# Altium PCB OutDoor-V3.PcbDoc
Units mm, origin at the board's own origin, x right, y up, seen from the top; angles counter-clockwise.
Board outline 20.89 x 21.75 mm, 2 copper layers (Top Layer, Bottom Layer), stack 1 mm thick; 12 components, 17 nets, 55 pads, 5 vias.
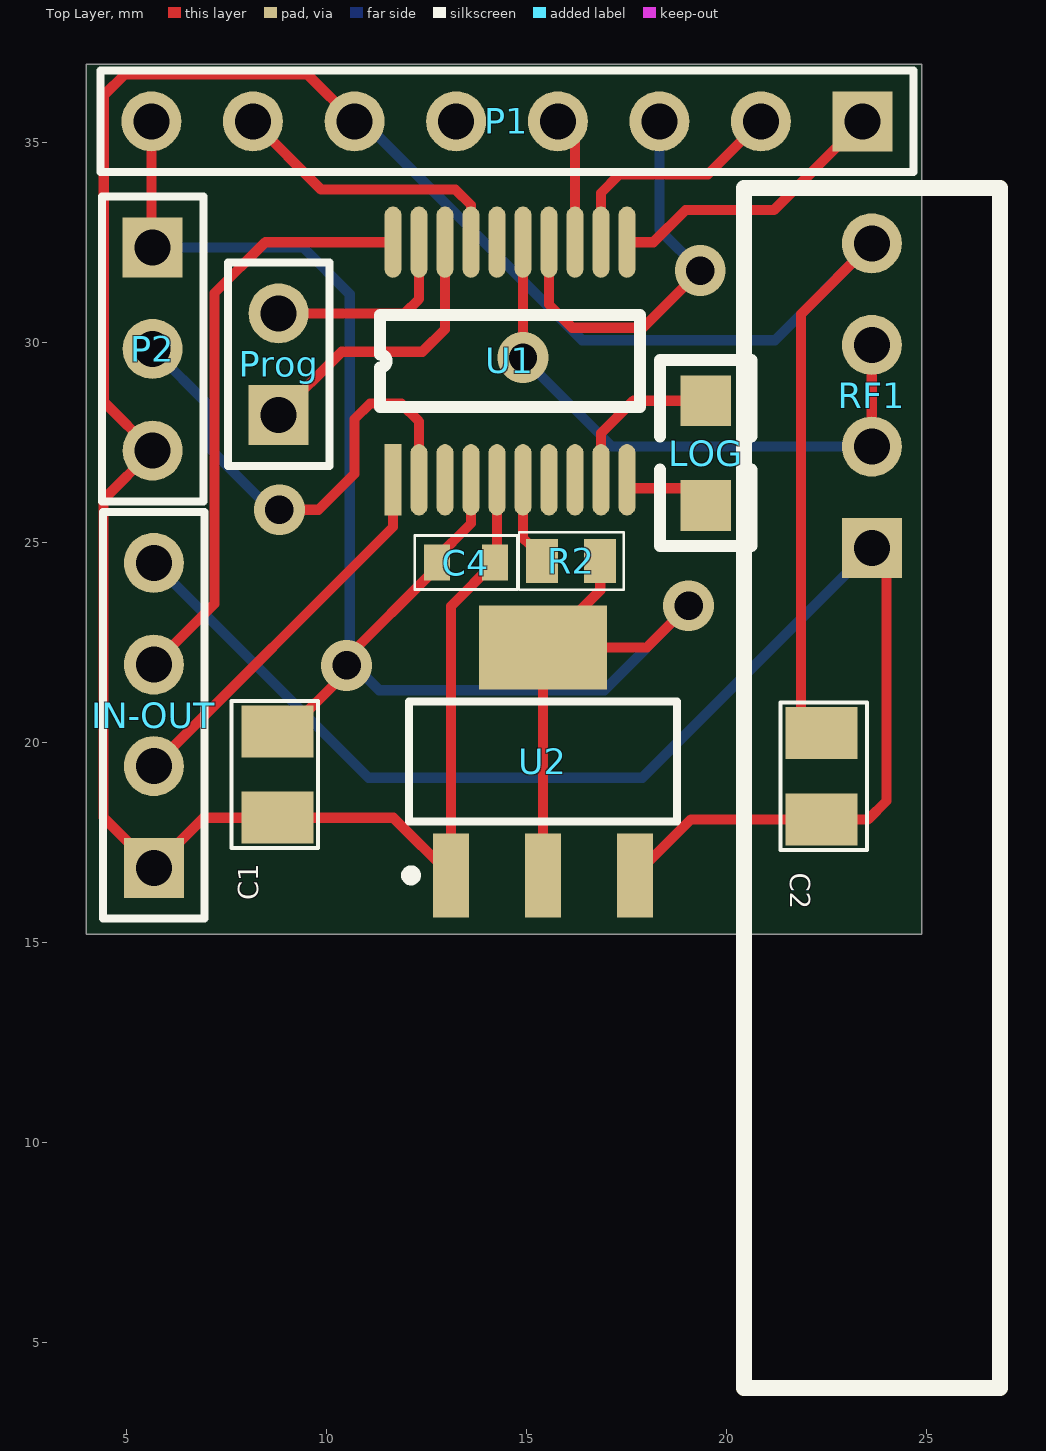
[diagram p0: Top Layer view]
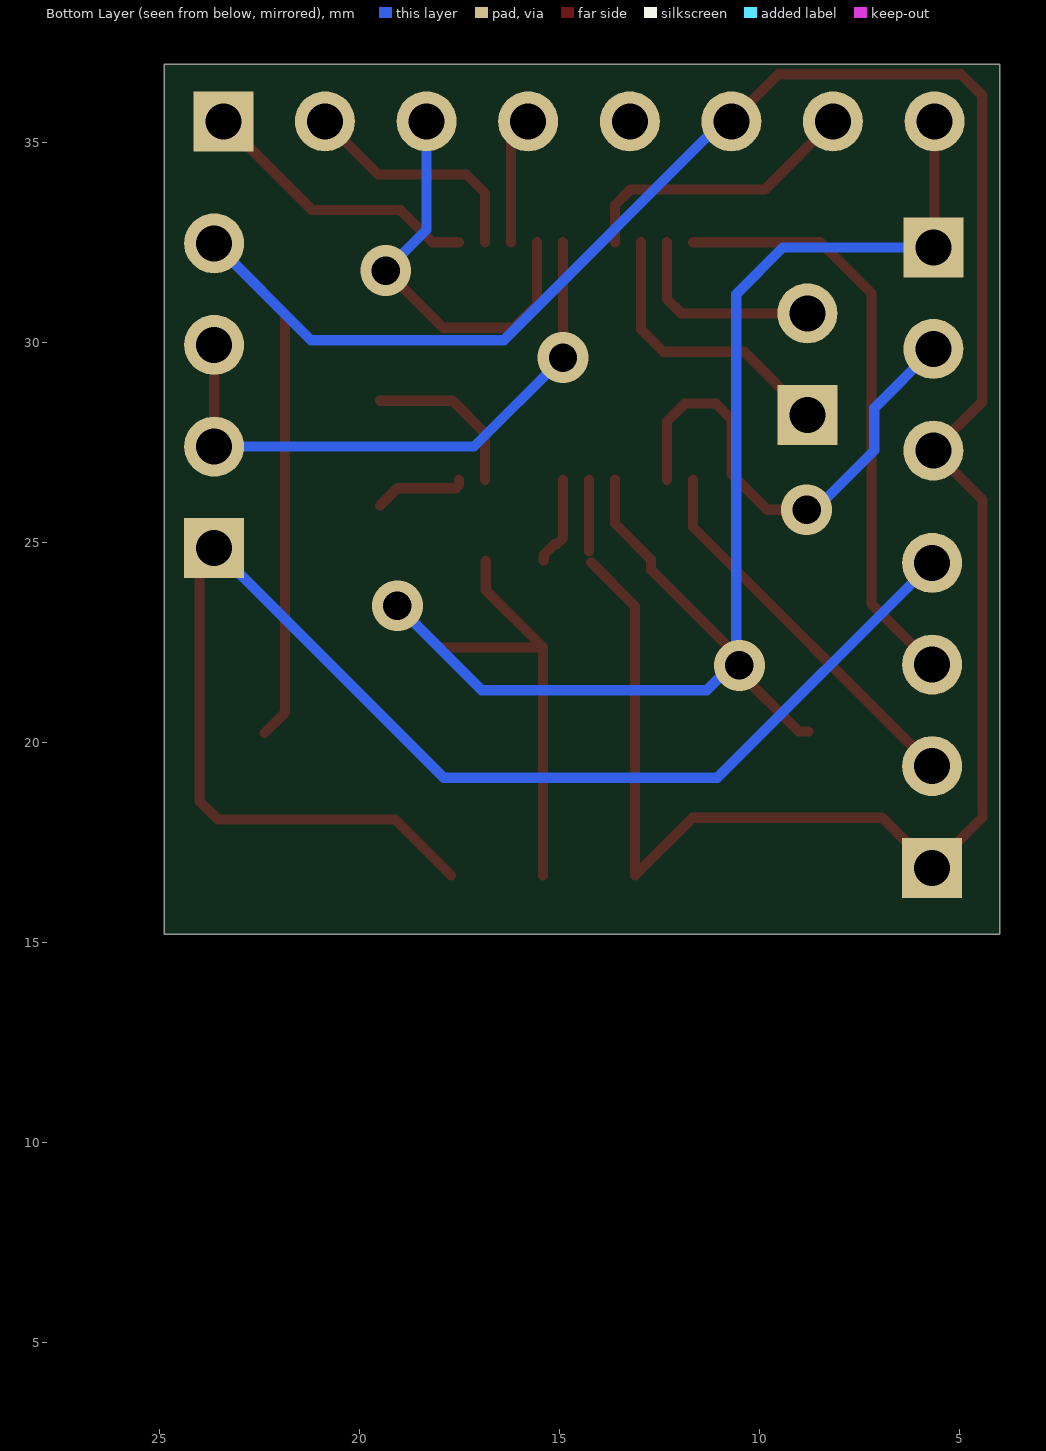
[diagram p1: Bottom Layer view, seen from below]

## Layer stack, top to bottom
Top Solder: solder mask 0.0102, Solder Resist, Dk 3.5
Top Layer: signal copper 0.0356
Dielectric 1: dielectric 0.929, FR-4, Dk 4.8
Bottom Layer: signal copper 0.0356
Bottom Solder: solder mask 0.0102, Solder Resist, Dk 3.5

## Board outline
3.99,15.22 24.88,15.22 24.88,36.97 3.99,36.97

## Design rules (kind name [scope] priority, off if disabled: settings)
Clearance [All] p1: gap=0.2 ignorepadtopadclearanceinfootprint=FALSE except(0: Arc-Hole Track-Hole SMDPad-Hole THPad-Hole Via-Hole Fill-Hole Poly-Hole Region-Hole Text-Hole; 0.4: Arc-Poly Track-Poly SMDPad-Poly THPad-Poly Via-Poly Fill-Poly Poly-Poly Poly-Region Poly-Text)
ComponentClearance [All] p1: gap=0 collisioncheckmode=3 verticalgap=0 showdistances=FALSE
DiffPairsRouting [All] p1: maxlimit=0.3 minlimit=0.1 mostfreqgap=0.2 toplayer_minwidth=0.1 toplayer_maxwidth=0.3 toplayer_prefwidth=0.2 bottomlayer_minwidth=0.1 bottomlayer_maxwidth=0.3 bottomlayer_prefwidth=0.2 maxuncoupledlength=12.7
MinimumSolderMaskSliver [All] p1: minsoldermaskwidth=0.004
PlaneConnect [All] p1: planeconnectstyle=Relief reliefexpansion=0.508 reliefentries=2 reliefconductorwidth=0.254 reliefairgap=0.254
PolygonConnect [All] p1: connectstyle=Relief reliefconductorwidth=0.254 reliefentries=4 polygonreliefangle="90 Angle" airgapwidth=0.254
PolygonConnect PolygonConnect_1 [InViaShielding vs InViaShielding] p2: connectstyle=Direct reliefconductorwidth=0.254 reliefentries=4 polygonreliefangle="90 Angle" airgapwidth=0.254
RoutingVias [All] p1: holewidth=0.711 width=1.27 viastyle="Through Hole" minholewidth=0.6 minwidth=1 maxholewidth=0.8 maxwidth=1.4
SilkToSolderMaskClearance [IsPad] p1: minsilkscreentomaskgap=0.025 clearancetoexposedcopper=TRUE
SolderMaskExpansion [All] p1: expansion=0.102 istentingtop=FALSE
Width [All] p1: maxlimit=1 minlimit=0.2 preferedwidth=0.254
25 further rules are at their usual default settings.

## Components (designator, comment, footprint, x,y, rotation, side; value= is the part's Value field where it differs from the comment)
C1 "10UF" CAP805 8.77,20.29 r270 top
C2 "10UF" CAP805 22.37,18.09 r90 top
C4 "CAP100NF25V0603" CAP603 12.76,24.51 r90 top value=100nF
IN-OUT "Header 4" HDR1X4 5.68,16.88 r90 top
LOG "Header 2" 0805 19.48,25.94 r90 top
P1 "RC522" HDR1X8 23.4,35.54 r180 top
P2 "TouchBoard" HDR1X3 5.65,32.39 r270 top
Prog "Header 2" HDR1X2 8.8,28.2 r90 top
R2 "10K" R0603 16.84,24.55 r180 top
RF1 "Header 4" RXB22 23.63,24.87 r0 top
U1 "STM32G030F6P6" SSOP20 11.66,26.58 r90 top
U2 "AMS1117" SOT-223 13.11,16.69 r0 top

## Footprints (in the part's own frame and the unit in brackets; to place one, negate y for a bottom-side part, rotate by r counter-clockwise, add the part's x,y. Pads: shape width x height; smd on the part's side, far side on the other; paste and mask are expansions set on the pad)
0805 [mil]
  rect 50x50 smd: 1(0,0) 2(103,0)
  silkscreen extent -40,-45 143,45
CAP603 [mm]
  rect 0.9x0.65 smd: 1(0,0) 2(0,-1.45)
  silkscreen extent -0.67,-2.01 0.68,0.55, body extent -0.43,-1.55 0.43,0.1, height 0.4
CAP805 [mm]
  rect 1.3x1.8 smd: 1(0,0) 2(2.159,0)
  silkscreen extent -0.76,-1.14 2.92,1.02, body extent -0.04,-0.66 2.01,0.64, height 0.5
HDR1X2 [mm] "Connector; Header; 2 Position"
  rect 1.5x1.5 hole 0.9: 1(0,0)
  round 1.5 hole 0.9: 2(2.54,0)
  silkscreen extent -1.27,-1.27 3.81,1.27
HDR1X3 [mm] "Connector; Header; 3 Position"
  rect 1.5x1.5 hole 0.9: 1(0,0)
  round 1.5 hole 0.9: 2(2.54,0) 3(5.08,0)
  silkscreen extent -1.27,-1.27 6.35,1.27
HDR1X4 [mm] "Connector; Header; 4 Position"
  rect 1.5x1.5 hole 0.9: 1(0,0)
  round 1.5 hole 0.9: 2(2.54,0) 3(5.08,0) 4(7.62,0)
  silkscreen extent -1.27,-1.27 8.89,1.27
HDR1X8 [mm] "Connector; Header; 8 Position"
  rect 1.5x1.5 hole 0.9: 1(0,0)
  round 1.5 hole 0.9: 2(2.54,0) 3(5.08,0) 4(7.62,0) 5(10.16,0) 6(12.7,0) 7(15.24,0) 8(17.78,0)
  silkscreen extent -1.27,-1.27 19.05,1.27
R0603 [mm]
  rect 0.8x1.1 smd: 1(0,0) 2(1.45,0)
  silkscreen extent -0.59,-0.71 2.03,0.72, body extent -0.1,-0.43 1.55,0.43, height 0.4
RXB22 [mm]
  rect 1.5x1.5 hole 0.9: 1(0,0)
  round 1.5 hole 0.9: 2(0,2.54) 3(0,5.08) 4(0,7.62)
  silkscreen extent -3.2,-21 3.2,9
SOT-223 [mm]
  rect 0.9x2.1 smd: 1(0,0) 2(2.3,0) 3(4.6,0)
  rect 3.2x2.1 smd: 4(2.3,5.7)
  silkscreen extent -1.12,-0.12 5.65,4.35, body extent -0.94,-0.64 5.54,6.34, height 1.64
SSOP20 [mm]
  rect 1.78x0.42 smd: 1(0,0)
  oval 1.78x0.42 smd: 2(0,-0.65) 3(0,-1.3) 4(0,-1.95) 5(0,-2.6) 6(0,-3.25) 7(0,-3.9) 8(0,-4.55) 9(0,-5.2) 10(0,-5.85) 11(5.94,-5.85) 12(5.94,-5.2) 13(5.94,-4.55) 14(5.94,-3.9) 15(5.94,-3.25) 16(5.94,-2.6) 17(5.94,-1.95) 18(5.94,-1.3) 19(5.94,-0.65) 20(5.94,0)
  silkscreen extent 1.82,-6.18 4.12,0.33

## Part data
C1 C2: library part radial, "radial cap", VOLT=16
C4: "CAP CER 0.1UF 25V X5R 0603", Capacitance=100nF, Case Code (Imperial)=0603, Case Code (Metric)=1608, Dielectric=X5R, Manufacturer 1="Kyocera AVX", Manufacturer Part Number 1=06033D104KAT2A, Max Operating Temperature=85°C, Min Operating Temperature=-55°C, Package Quantity=1, Supplier Part Number 1=478-1244-1-ND, Tolerance=10%, Voltage=25V, Case/Package=0603, ComponentLink1Description=https://datasheet.ciiva.com/19475/1031061-19475906.pdf?src-supplier=Jameco, ComponentLink1URL=https://datasheet.ciiva.com/19475/1031061-19475906.pdf?src-supplier=Jameco, ComponentLink2Description=https://datasheet.ciiva.com/152/cx5r-152225.pdf?src-supplier=Digi-Key, ComponentLink2URL=https://datasheet.ciiva.com/152/cx5r-152225.pdf?src-supplier=Digi-Key, ComponentLink3Description=https://datasheet.ciiva.com/2987/cx5r-2987761.pdf?src-supplier=Avnet, ComponentLink3URL=https://datasheet.ciiva.com/2987/cx5r-2987761.pdf?src-supplier=Avnet, ComponentLink4Description=https://datasheet.ciiva.com/152/cx5r-152227.pdf?src-supplier=Digi-Key, ComponentLink4URL=https://datasheet.ciiva.com/152/cx5r-152227.pdf?src-supplier=Digi-Key, ComponentLink5Description=https://datasheet.ciiva.com/16397/cx5r-16397162.pdf?src-supplier=Future+Electronics, ComponentLink5URL=https://datasheet.ciiva.com/16397/cx5r-16397162.pdf?src-supplier=Future+Electronics, ComponentLink6Description=https://datasheet.ciiva.com/28613/759405-28613274.pdf?src-supplier=Element14, ComponentLink6URL=https://datasheet.ciiva.com/28613/759405-28613274.pdf?src-supplier=Element14, ComponentLink7Description=https://datasheet.ciiva.com/152/cx5r-152226.pdf?src-supplier=Digi-Key, ComponentLink7URL=https://datasheet.ciiva.com/152/cx5r-152226.pdf?src-supplier=Digi-Key, ComponentLink8Description=https://datasheet.ciiva.com/2987/cx5r-2987762.pdf?src-supplier=Avnet, ComponentLink8URL=https://datasheet.ciiva.com/2987/cx5r-2987762.pdf?src-supplier=Avnet, ComponentLink9Description=https://datasheet.ciiva.com/28613/1666675-28613275.pdf?src-supplier=Element14, ComponentLink9URL=https://datasheet.ciiva.com/28613/1666675-28613275.pdf?src-supplier=Element14, ComponentLink10Description=https://datasheet.ciiva.com/28613/1666675-28613037.pdf?src-supplier=Element14, ComponentLink10URL=https://datasheet.ciiva.com/28613/1666675-28613037.pdf?src-supplier=Element14, Contact Plating=Tin, Depth=0.81mm, Description 1="CAP CER 0.1UF 25V X5R 0603", Height=0.9mm, Lead Free="Lead Free", Length=1.6mm, Mount="Surface Mount", Number of Pins=2, Packaging="Tape and Reel", Pricing 1="1=0,35000, 10=0,24200, 100=0,14490, 500=0,10868, 1000=0,09177 (USD)", Radiation Hardening=No, REACH SVHC="No SVHC", RoHS=Yes, Stock 1=100206, Supplier 1=Digi-Key, Termination=SMD/SMT, Thickness=0.035inch, Voltage Rating=25V, Voltage Rating (DC)=25V, Width=0.032inch
IN-OUT RF1: "Header, 4-Pin", LatestRevisionDate=17-Jul-2002, LatestRevisionNote="Re-released for DXP Platform.", Publisher="Altium Limited"
LOG Prog: "Header, 2-Pin", LatestRevisionDate=17-Jul-2002, LatestRevisionNote="Re-released for DXP Platform.", Publisher="Altium Limited"
P1: library part "Header 8", "Header, 8-Pin", LatestRevisionDate=17-Jul-2002, LatestRevisionNote="Re-released for DXP Platform.", Publisher="Altium Limited"
P2: library part "Header 3", "Header, 3-Pin", LatestRevisionDate=17-Jul-2002, LatestRevisionNote="Re-released for DXP Platform.", Publisher="Altium Limited"
R2: library part RES, "RES", WAT=0.25W
U2: VOLT=5

## Via types
v1: diameter 1.27, hole 0.711, Top Layer to Bottom Layer, 5 vias

## Nets (pads, with @x,y where several pads share a name; then routed paths per layer and width w, separated by ;. In a path a pad name is that pad's centre, name@x,y a point inside that pad or via, vN(x,y) a via of type N, cw(c..) or ccw(c..) an arc to the next point about the centre after c; other vN are vias at no path point)
"+3.3 VDC": C1.1 C4.1 P1.8 P2.1 R2.1 U1.4 U2.2 U2.4 | length 48.5
  Top Layer w0.254: P1.8 5.62,32.42 P2.1 ; C1.1 9.02,20.29 10.5,21.77 10.5,22.125 12.708,24.333 12.708,24.583 13.61,25.485 U1.4 ; U2.2 U2.4 ; R2.1 16.84,23.82 U2.4 ; v1(19.05,23.43) 18.01,22.39 U2.4
  Bottom Layer w0.254: P2.1 9.411,32.39 10.58,31.221 10.58,22.02 v1(10.5,21.94) 10.697,21.94 11.317,21.32 16.94,21.32 v1(19.05,23.43)
"+5 VDC": C2.1 IN-OUT.4 RF1.1 U2.3 | length 36.1
  Top Layer w0.254: U2.3 19.11,18.09 C2.1 23.538,18.09 24,18.552 24,24.5 RF1.1
  Bottom Layer w0.254: IN-OUT.4 11.049,19.131 17.891,19.131 RF1.1
GND: C1.2 C2.2 C4.2 IN-OUT.1 P1.6 P2.3 RF1.4 U1.5 U2.1 | length 75.8
  Top Layer w0.254: P1.6 9.52,36.72 4.959,36.72 4.43,36.191 4.43,28.53 P2.3 4.42,26.08 4.42,18.14 IN-OUT.1 6.931,18.131 C1.2 11.669,18.131 U2.1 13.11,23.42 C4.2@14.205,24.515 ; C4.2@14.26,24.79 U1.5 ; C2.2 21.86,20.759 21.86,30.72 RF1.4
  Bottom Layer w0.254: P1.6 10.92,35.54 16.39,30.07 21.21,30.07 RF1.4
IN_Touch: P2.2 U1.2 | length 12.5
  Top Layer w0.254: v1(8.82,25.83) 9.8,25.83 10.7,26.73 10.7,28.1 11.085,28.485 11.865,28.485 12.31,28.04 U1.2
  Bottom Layer w0.254: P2.2 7.13,28.37 7.13,27.31 8.61,25.83 v1(8.82,25.83)
"MISO RFID": P1.4 U1.13 | length 3.2
  Top Layer w0.254: P1.4 16.21,35.11 U1.13
"MOSI RFID": P1.3 U1.14 | length 10.3
  Top Layer w0.254: U1.14 15.56,30.96 16.14,30.38 17.91,30.38 v1(19.34,31.81)
  Bottom Layer w0.254: P1.3 18.32,32.83 v1(19.34,31.81)
NRST: R2.2 U1.6 | length 2.2
  Top Layer w0.254: U1.6 14.91,25.122 15.059,24.973 15.117,24.973 15.39,24.7 R2.2@15.39,24.563
RF433: RF1.2 RF1.3 U1.15 | length 15.1
  Top Layer w0.254: v1(14.91,29.634) U1.15 ; RF1.2 RF1.3
  Bottom Layer w0.254: v1(14.91,29.634) 17.134,27.41 RF1.2
"RST RFID": P1.7 U1.17 | length 7.2
  Top Layer w0.254: P1.7 9.866,33.834 13.224,33.834 13.61,33.448 U1.17
"SCK RFID": P1.2 U1.12 | length 6
  Top Layer w0.254: U1.12 16.86,33.75 17.32,34.21 19.53,34.21 P1.2
SS_RFID: P1.1 U1.11 | length 7.1
  Top Layer w0.254: U1.11 18.17,32.52 18.972,33.322 21.182,33.322 P1.1
SWCLK: Prog.2 U1.19 | length 5.1
  Top Layer w0.254: Prog.2 11.954,30.74 12.31,31.096 U1.19
SWDIO: Prog.1 U1.18 | length 7.2
  Top Layer w0.254: Prog.1 10.38,29.78 12.396,29.78 12.96,30.344 U1.18
USART1-RX: IN-OUT.2 U1.1 | length 9.6
  Top Layer w0.254: IN-OUT.2 11.66,25.4 U1.1
USART1-TX: IN-OUT.3 U1.20 | length 14.9
  Top Layer w0.254: IN-OUT.3 7.2,23.48 7.2,31.25 8.47,32.52 U1.20
USART2-RX: LOG.1 U1.10 | length 2.3
  Top Layer w0.254: U1.10 17.51,26.447 17.587,26.37 19.05,26.37 LOG.1
USART2-TX: LOG.2 U1.9 | length 4.1
  Top Layer w0.254: U1.9 16.86,27.747 17.669,28.556 LOG.2
pads on no net: P1.5 U1.3 U1.7 U1.8 U1.16